# Altium PCB Overview.PcbDoc
Units mm, origin at the board's own origin, x right, y up, seen from the top; angles counter-clockwise.
Board outline 90.3 x 97.6 mm, 2 copper layers (Top Layer, Bottom Layer), stack 1.571 mm thick; 63 components, 22 nets, 227 pads, 5 vias.
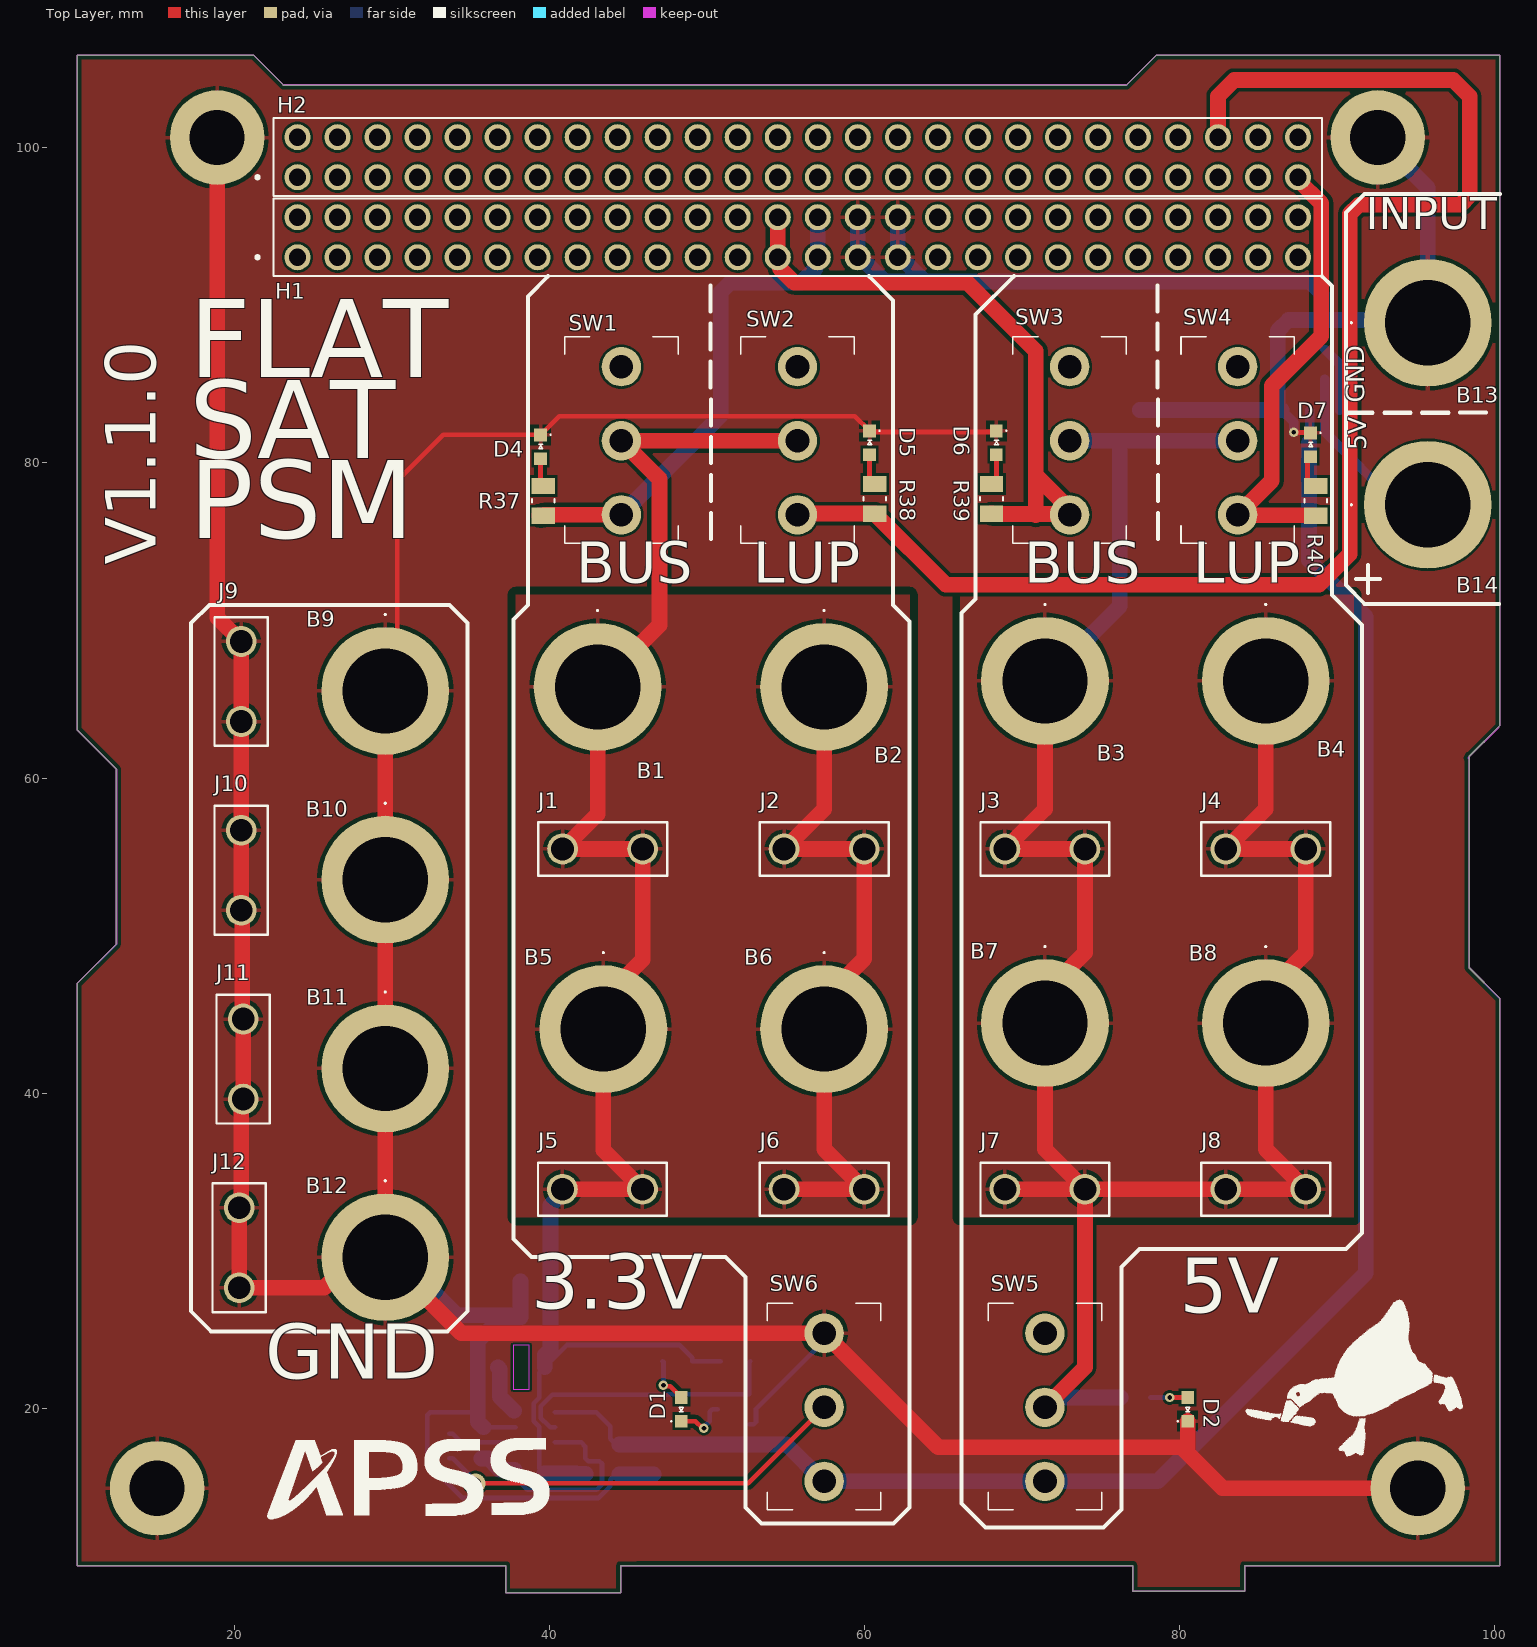
[diagram p0: Top Layer view]
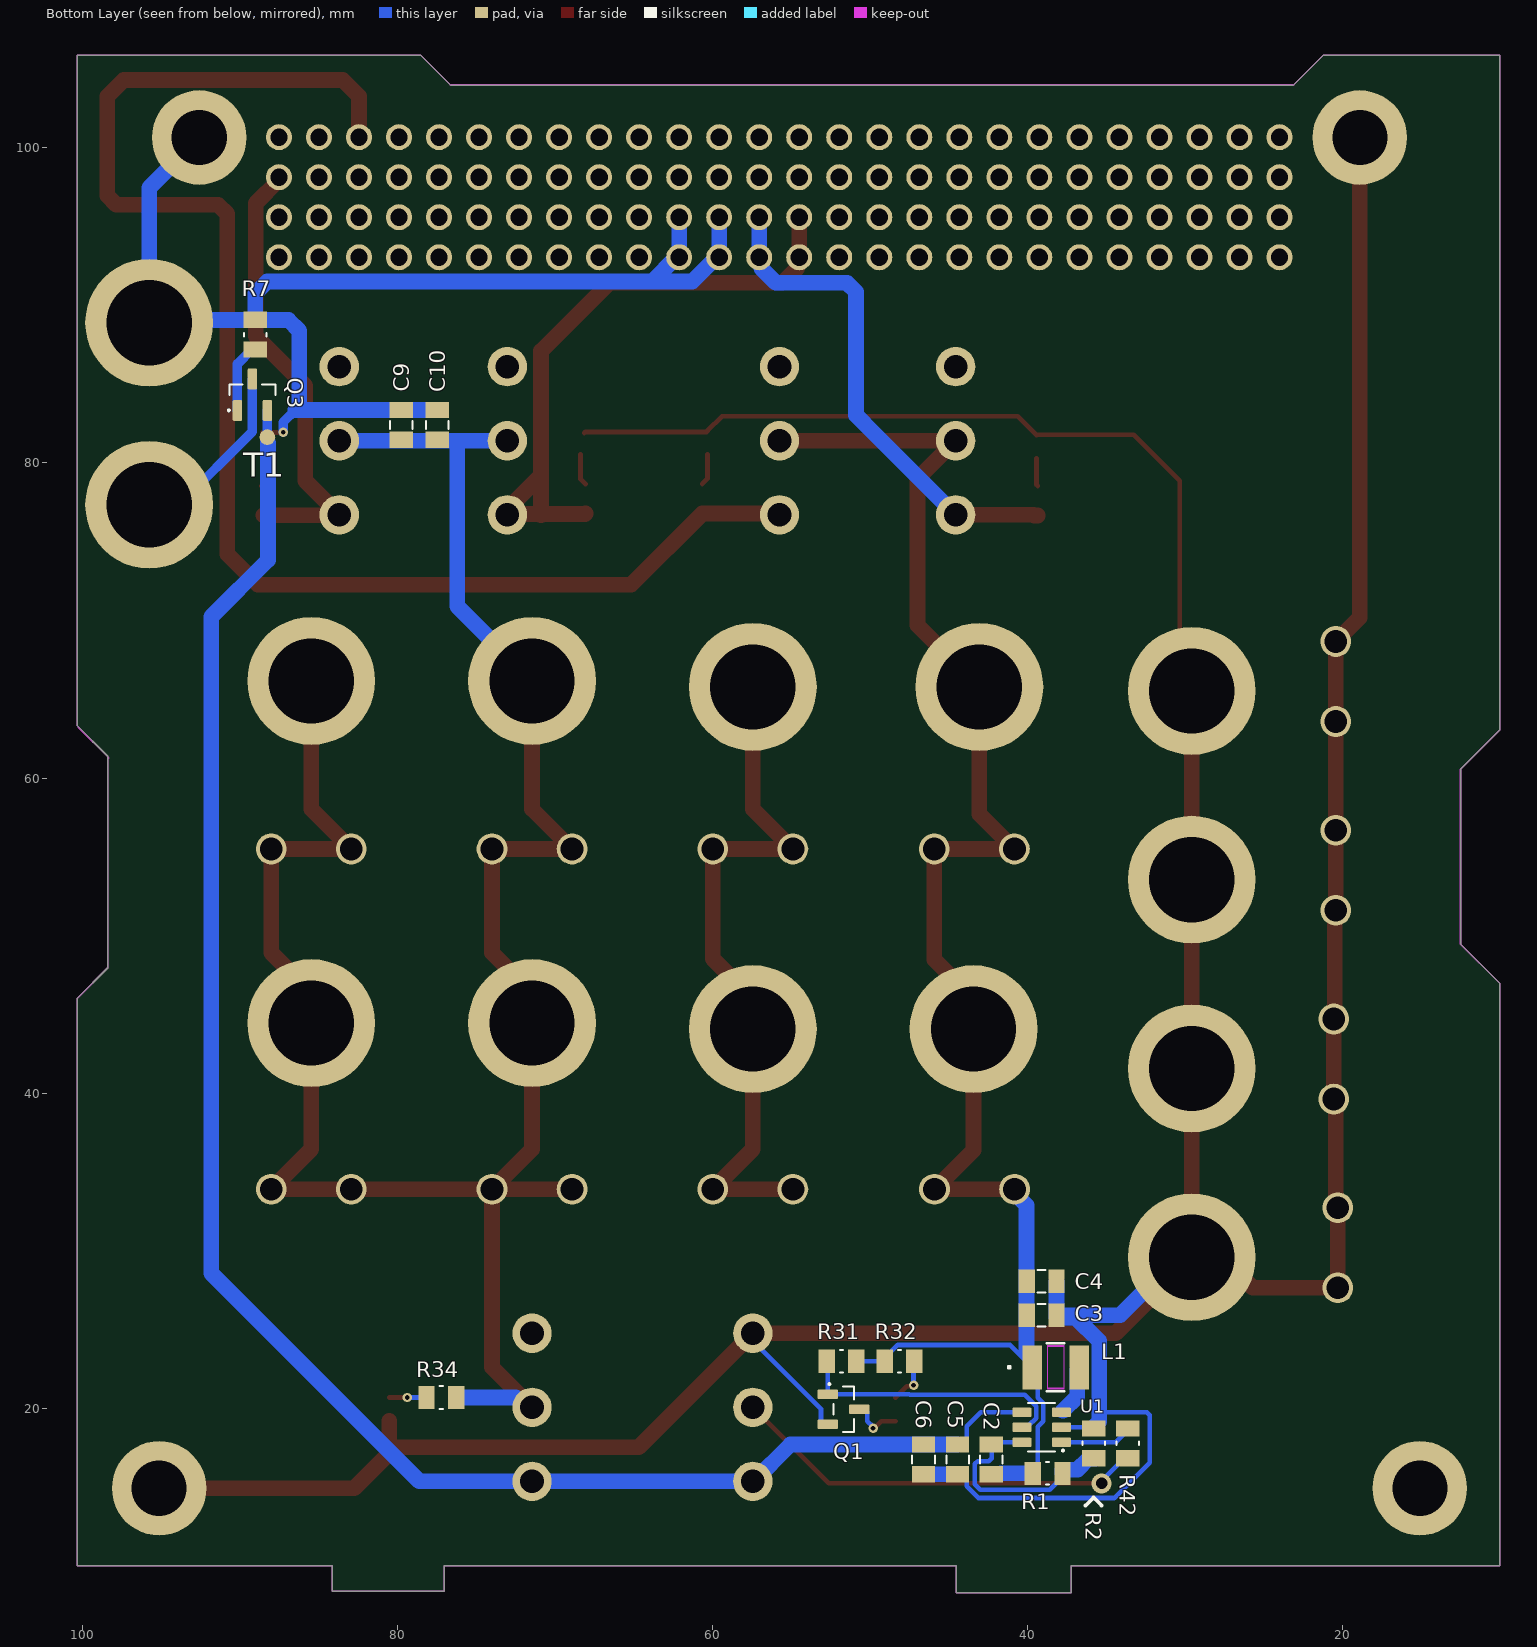
[diagram p1: Bottom Layer view, seen from below]
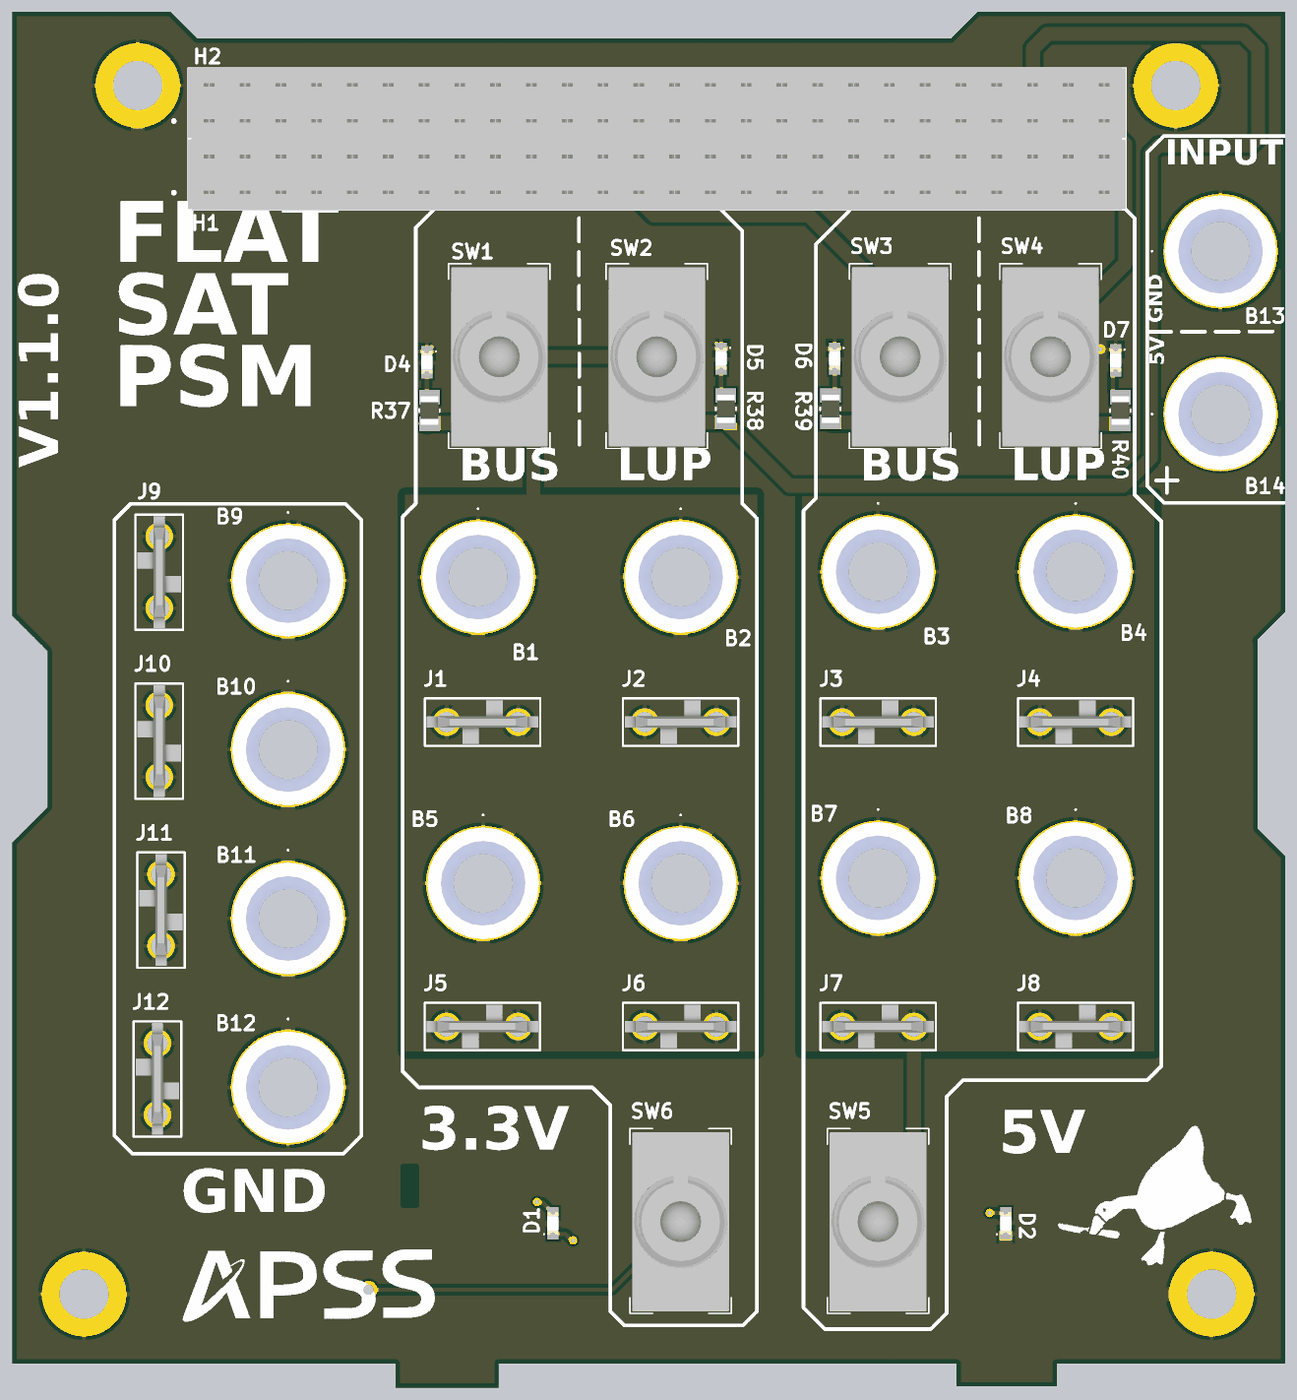
[diagram p2: 3D render of the assembled board from above, using the file's embedded part models]
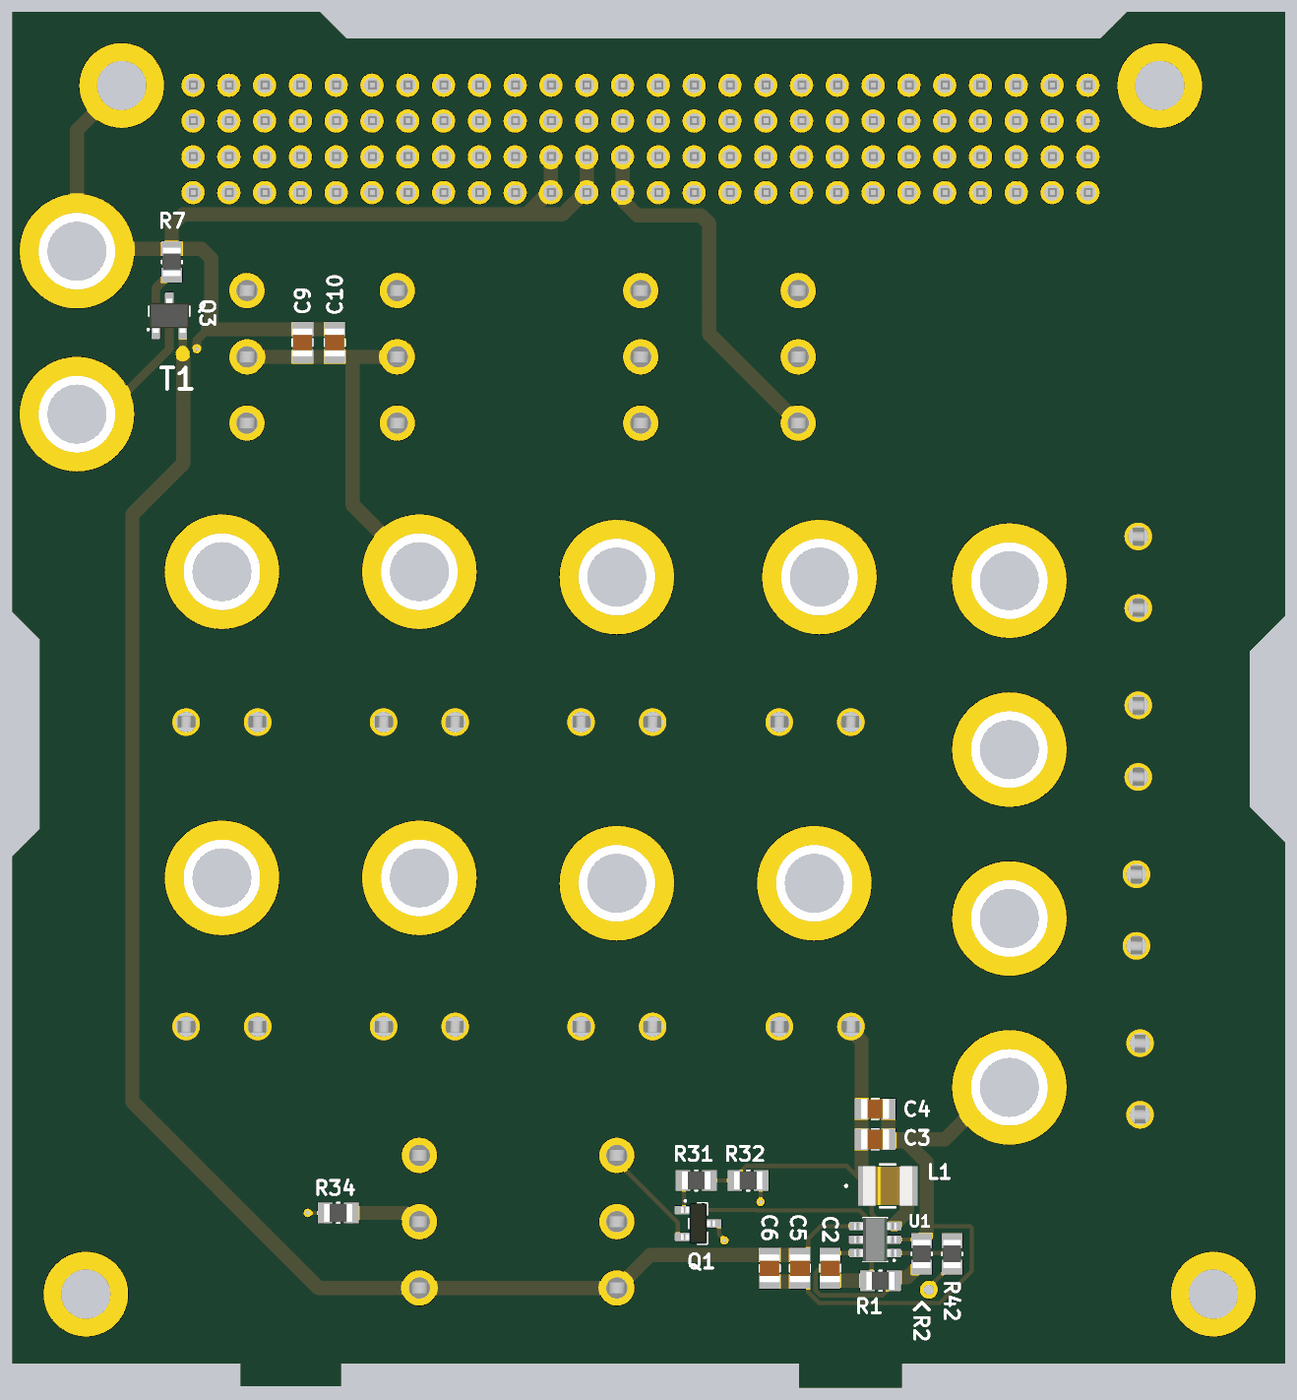
[diagram p3: 3D render of the assembled board from below, using the file's embedded part models]

## Layer stack, top to bottom
Top Solder: solder mask 0.0102, Solder Resist, Dk 3.5
Top Layer: signal copper 0.0356
Dielectric 1: dielectric 1.5, FR-4, Dk 4.8
Bottom Layer: signal copper 0.0356
Bottom Solder: solder mask 0.0102, Solder Resist, Dk 3.5

## Board outline
10.033,10 37.233,10 37.233,8.285 44.533,8.285 44.533,10 45.533,10 52.07,10 77.033,10 77.033,8.385 84.133,8.385 84.133,10 100.33,10 100.33,46.01 98.383,47.957 98.383,61.385 100.333,63.335 100.333,105.885 78.533,105.885 76.633,103.985 23.133,103.985 21.233,105.885 10.033,105.885 10.033,63.06 12.533,60.56 12.533,49.46 10.033,46.96

## Design rules (kind name [scope] priority, off if disabled: settings)
Clearance [All] p1: gap=0.152 ignorepadtopadclearanceinfootprint=FALSE except(0.25: Track-Poly; 0.5: Poly-Poly)
Height [All] p1: minheight=0 maxheight=45.4 prefheight=12.7
HoleSize [All] p1: absolutevalues=TRUE maxlimit=6.2 minlimit=0.3 maxpercent=80.000 minpercent=20.000
MinimumAnnularRing [All] p1: minimumring=0.15
MinimumSolderMaskSliver [All] p1: minsoldermaskwidth=0.1
PolygonConnect ViaConnect [IsVia] p1: connectstyle=Direct reliefconductorwidth=0.254 reliefentries=4 polygonreliefangle="90 Angle" airgapwidth=0.254
PolygonConnect [All] p2: connectstyle=Relief reliefconductorwidth=0.254 reliefentries=4 polygonreliefangle="90 Angle" airgapwidth=0.254
RoutingVias [All] p1: holewidth=0.3 width=0.6 viastyle="Through Hole" minholewidth=0.3 minwidth=0.5 maxholewidth=1 maxwidth=5
SilkToSilkClearance [All] p1: silktosilkclearance=0.1
SilkToSolderMaskClearance [IsPad] p1: minsilkscreentomaskgap=0.1 clearancetoexposedcopper=TRUE
SolderMaskExpansion [All] p1: expansion=0.051 istentingtop=FALSE
SupplyNets "Schematic Supply Nets_9" [InNet('3V3_LUP_BUS')] p1: voltage=0.000
SupplyNets "Schematic Supply Nets_8" [InNet('GND')] p2: voltage=0.000
SupplyNets "Schematic Supply Nets_6" [InNet('5V_LUP_BUS')] p3: voltage=0.000
SupplyNets "Schematic Supply Nets_5" [InNet('3V3_IN')] p4: voltage=0.000
SupplyNets "Schematic Supply Nets_4" [InNet('5V_BUS')] p5: voltage=0.000
SupplyNets "Schematic Supply Nets_3" [InNet('3V3_OUT')] p6: voltage=0.000
SupplyNets "Schematic Supply Nets_1" [InNet('3V3_BUS')] p7: voltage=0.000
SupplyNets "Schematic Supply Nets" [InNet('5V_OUT')] p8: voltage=0.000
Width [All] p1: maxlimit=1 minlimit=0.15 preferedwidth=0.3 minimp=50.000000 maximp=50.000000 favimp=50.000000
25 further rules are at their usual default settings.

## Classes and differential pairs
component class Interfaces: B1 B2 B3 B4 B5 B6 B7 B8 B9 B10 B11 B12 B13 B14 H1 H2 J1 J2 J3 J4 J5 J6 J7 J8 J9 J10 J11 J12 Q3 R7 T1
component class Overview: C2 C3 C4 C5 C6 C9 C10 D1 D2 D4 D5 D6 D7 L1 Q1 Q? R1 R2 R31 R32 R34 R37 R38 R39 R40 R42 SW1 SW2 SW3 SW4 SW5 SW6 U1 U?

## Components (designator, comment, footprint, x,y, rotation, side; value= is the part's Value field where it differs from the comment)
B1 "575-4" 5754 43.071,65.786 r270 top locked
B2 "575-4" 5754 57.446,65.786 r270 top locked
B3 "575-4" 5754 71.459,66.167 r270 top locked
B4 "575-4" 5754 85.471,66.167 r270 top locked
B5 "575-4" 5754 43.434,44.069 r270 top locked
B6 "575-4" 5754 57.446,44.069 r270 top locked
B7 "575-4" 5754 71.459,44.45 r270 top locked
B8 "575-4" 5754 85.471,44.45 r270 top locked
B9 "575-4" 5754 29.591,65.532 r270 top locked
B10 "575-4" 5754 29.591,53.552 r270 top locked
B11 "575-4" 5754 29.591,41.571 r270 top locked
B12 "575-4" 5754 29.591,29.591 r270 top locked
B13 "575-4" 5754 95.758,77.343 r0 top
B14 "575-4" 5754 95.758,88.9 r0 top
C2 "22uF" CAPACITOR_0805_2012M-70N 42.316,16.764 r270 bottom
C3 "22uF" CAPACITOR_0805_2012M-70N 39.116,25.908 r0 bottom
C4 "22uF" CAPACITOR_0805_2012M-70N 39.116,28.067 r0 bottom
C5 "22uF" CAPACITOR_0805_2012M-70N 44.45,16.764 r90 bottom
C6 "100uF" CAPACITOR_0805_2012M-70N 46.609,16.764 r90 bottom
C9 "22uF" CAPACITOR_0805_2012M-70N 79.756,82.423 r270 bottom
C10 "22uF" CAPACITOR_0805_2012M-70N 77.47,82.423 r270 bottom
D1 "LTST-C190 Series" LED_0603_1608M_0.80mm 48.387,19.939 r90 top
D2 "LTST-C190 Series" LED_0603_1608M_0.80mm 80.518,19.939 r90 top
D4 "LTST-C190 Series" LED_0603_1608M_0.80mm 39.445,81.026 r270 top
D5 "LTST-C190 Series" LED_0603_1608M_0.80mm 60.325,81.28 r270 top
D6 "LTST-C190 Series" LED_0603_1608M_0.80mm 68.378,81.28 r270 top
D7 "LTST-C190 Series" LED_0603_1608M_0.80mm 88.311,81.152 r270 top
H1 "ESQ-126-14-G-D" *SAMTEC_ESQ-126-14-G-D 24.022,95.593 r0 top locked
H2 "ESQ-126-14-G-D" *SAMTEC_ESQ-126-14-G-D 24.022,100.672 r0 top locked
J1 "1217861-1" CONN_1217861-1_TEC 40.848,55.499 r0 top locked
J2 "1217861-1" CONN_1217861-1_TEC 54.906,55.499 r0 top locked
J3 "1217861-1" CONN_1217861-1_TEC 68.919,55.499 r0 top locked
J4 "1217861-1" CONN_1217861-1_TEC 82.931,55.499 r0 top locked
J5 "1217861-1" CONN_1217861-1_TEC 40.837,33.909 r0 top locked
J6 "1217861-1" CONN_1217861-1_TEC 54.906,33.909 r0 top
J7 "1217861-1" CONN_1217861-1_TEC 68.919,33.909 r0 top
J8 "1217861-1" CONN_1217861-1_TEC 82.931,33.909 r0 top locked
J9 "1217861-1" CONN_1217861-1_TEC 20.447,63.589 r90 top locked
J10 "1217861-1" CONN_1217861-1_TEC 20.447,51.609 r90 top locked
J11 "1217861-1" CONN_1217861-1_TEC 20.574,39.628 r90 top locked
J12 "1217861-1" CONN_1217861-1_TEC 20.32,27.648 r90 top locked
L1 "DFE322520FD-2R2M=P2" IND_DFE3225_MUR 38.227,22.606 r180 bottom
Q1 "MMBT619" SOT23-3N-1.15mm 51.689,19.939 r180 bottom
Q3 "SSM3J328R,LF" SOT23F-3-0.8mm 89.205,84.328 r90 bottom
R1 "68k" RESISTOR_0805_2012M-50N 38.735,15.875 r0 bottom
R2 "15k" RESISTOR_0805_2012M-50N 35.814,17.78 r270 bottom
R7 "12k" RESISTOR_0805_2012M-50N 89.027,88.138 r270 bottom
R31 "4.3k" RESISTOR_0805_2012M-50N 51.816,22.987 r180 bottom
R32 "240" RESISTOR_0805_2012M-50N 48.133,22.987 r180 bottom
R34 "620" RESISTOR_0805_2012M-50N 77.216,20.689 r0 bottom
R37 "240" RESISTOR_0805_2012M-50N 39.624,77.597 r270 top
R38 "240" RESISTOR_0805_2012M-50N 60.66,77.724 r270 top
R39 "620" RESISTOR_0805_2012M-50N 68.072,77.724 r270 top
R40 "620" RESISTOR_0805_2012M-50N 88.646,77.596 r270 top
R42 "68k" RESISTOR_0805_2012M-50N 33.655,17.78 r90 bottom
SW1 "ANT11SF1CQE" ANT11SF1CQE 44.577,81.407 r0 top
SW2 "ANT11SF1CQE" ANT11SF1CQE 55.753,81.407 r0 top
SW3 "ANT11SF1CQE" ANT11SF1CQE 73.025,81.408 r0 top
SW4 "ANT11SF1CQE" ANT11SF1CQE 83.693,81.407 r0 top
SW5 "ANT11SF1CQE" ANT11SF1CQE 71.459,20.066 r0 top
SW6 "ANT11SF1CQE" ANT11SF1CQE 57.446,20.066 r0 top
T1 "Test Pad" "Test Pad" 88.255,81.638 r180 bottom
U1 "AP3445LW6-7" SOT23-6N-1.4mm 39.116,18.796 r0 bottom

## Footprints (in the part's own frame and the unit in brackets; to place one, negate y for a bottom-side part, rotate by r counter-clockwise, add the part's x,y. Pads: shape width x height; smd on the part's side, far side on the other; paste and mask are expansions set on the pad)
5754 [mm]
  round 8.115 hole 5.41: 1(0,0)
  silkscreen extent -4.9,-0.05 -4.8,0.05, body extent -3.96,-3.96 3.96,3.96, height 2.36
*SAMTEC_ESQ-126-14-G-D [mm]
  round 1.65 hole 1.1: 1(0,-2.54) 2(0,0) 3(2.54,-2.54) 4(2.54,0) 5(5.08,-2.54) 6(5.08,0) 7(7.62,-2.54) 8(7.62,0) 9(10.16,-2.54) 10(10.16,0) 11(12.7,-2.54) 12(12.7,0) 13(15.24,-2.54) 14(15.24,0) 15(17.78,-2.54) 16(17.78,0) 17(20.32,-2.54) 18(20.32,0) 19(22.86,-2.54) 20(22.86,0) 21(25.4,-2.54) 22(25.4,0) 23(27.94,-2.54) 24(27.94,0) 25(30.48,-2.54) 26(30.48,0) 27(33.02,-2.54) 28(33.02,0) 29(35.56,-2.54) 30(35.56,0) 31(38.1,-2.54) 32(38.1,0) 33(40.64,-2.54) 34(40.64,0) 35(43.18,-2.54) 36(43.18,0) 37(45.72,-2.54) 38(45.72,0) 39(48.26,-2.54) 40(48.26,0) 41(50.8,-2.54) 42(50.8,0) 43(53.34,-2.54) 44(53.34,0) 45(55.88,-2.54) 46(55.88,0) 47(58.42,-2.54) 48(58.42,0) 49(60.96,-2.54) 50(60.96,0) 51(63.5,-2.54) 52(63.5,0)
  silkscreen extent -2.64,-3.74 65.03,1.2, body extent -1.55,-3.79 65,1.29, height 11.11
ANT11SF1CQE [mm] "Toggle switch, SPDT"
  round 2.5 hole 1.5: 1(0,-4.7) 2(0,0) 3(0,4.7)
  silkscreen extent -3.6,-6.5 3.6,6.6, body extent -3.43,-6.35 3.43,6.35, height 28.21
CAPACITOR_0805_2012M-70N [mm] "Capacitor, 0805 (2012 metric), 0.7mm high, nominal pads,"
  rect 1.04x1.47 smd mask+0.051: 1(-0.94,0) 2(0.94,0)
  silkscreen extent -0.25,-0.72 0.25,0.72, body extent -1,-0.72 1,0.73, height 1.23
CONN_1217861-1_TEC [mil]
  round 77 / inner oval 77x60 / far side round 77 hole 57 paste-99999 mask+0: 1(0,0) 2(200,0)
  silkscreen extent -61,-66 261,66, body extent -56,-61 256,61, height 415
IND_DFE3225_MUR [mil]
  rect 49x110 smd paste+0 mask+0: 1(-58.5,0) 2(58.5,0)
  Top Layer keep-out region: -20,-53 -20,53 20,53 20,-53
  Keep-Out Layer region: -20,-55 -20,55 20,55 20,-55
  silkscreen extent -119,-60 22,60, body extent -69,-55 69,55, height 79
LED_0603_1608M_0.80mm [mm] "LED, 0603 (1608 metric), 0.8mm high"
  rect 0.8x0.8 smd mask+0.051: A(0.75,0) C(-0.75,0)
  silkscreen extent -0.79,-0.12 0.13,0.66, body extent -0.8,-0.4 0.8,0.4, height 0.8
RESISTOR_0805_2012M-50N [mm] "Resistor, 0805 (2012 metric), nominal pads"
  rect 1.04x1.47 smd mask+0.051: 1(-0.94,0) 2(0.94,0)
  silkscreen extent -0.1,-0.72 0.1,0.72, body extent -1,-0.62 1,0.63, height 0.5
SOT23-3N-1.15mm [mm] "SOT23, 3-pin, 1.15mm high, nominal pads"
  rrect25% 1.32x0.6 smd mask+0.051: 1(-1,0.95) 2(-1,-0.95) 3(1,0)
  silkscreen extent -0.93,-1.45 0.65,1.63, body extent -1.19,-1.45 1.21,1.45, height 0.91
SOT23-6N-1.4mm [mm] "SOT23, 6 pins, nominal pads, 1.4mm high"
  rrect25% 1.21x0.59 smd mask+0.051: 1(-1.255,0.95) 2(-1.255,0) 3(-1.255,-0.95) 4(1.255,-0.95) 5(1.255,0) 6(1.255,0.95)
  silkscreen extent -1.37,-1.55 0.85,1.55, body extent -1.5,-1.55 1.5,1.55, height 1.4
SOT23F-3-0.8mm [mm] "SOT23, 3-pin, flat leads, 0.8mm high"
  rrect25% 1.32x0.6 smd mask+0.051: 1(-1,0.95) 2(-1,-0.95) 3(1,0)
  silkscreen extent -1.02,-1.45 0.65,1.52, body extent -1.2,-1.4 1.2,1.4, height 0.88
"Test Pad" [mm] "Exposed copper pad"
  round 1 smd paste-10: 1(0,0)

## Part data
B1 B2 B3 B4 B5 B6 B7 B8 B9 B10 B11 B12 B13 B14: "Test Plugs & Test Jacks NON-INSUL JACK .218\" BRASS NICKEL PLTD", Manufacturer_Name="Keystone Electronics", Mouser Part Number=534-575-4, Datasheet Link=https://www.keyelco.com/product.cfm/product_id/2379, Geometry.Height=2.49mm, Manufacturer_Part_Number=575-4, Mouser Price/Stock=https://www.mouser.co.uk/ProductDetail/Keystone-Electronics/575-4?qs=w4ABFRoM%2FL8pPaUzIDyX8Q%3D%3D
C2 C3 C4 C5 C6 C9 C10: library part "Generic Capacitor", "Passive - Capacitor, Generic", Tolerance=?%
D1 D2 D4 D5 D6 D7: "Diode - LED, 0603", Colour=GREEN, MF Part No.=LTST-C190KGKT, Package=0603, Rated Voltage="5V Reverse", Temp Range="-30°C ~ 85°C", APSS Standard Part="APSS Standard", Supplier 1=Digikey
H1 H2: TEMP="-55°C ~ 125°C", MCR=5.7A, MF="Samtec Inc.", MFPN=ESQ-126-14-G-D, MVP=Y, MVR=550VAC, S1L=https://www.digikey.co.nz/product-detail/en/samtec-inc/ESQ-126-14-G-D/SAM11114-ND/6695078, S1PN=SAM11114-ND
J1 J2 J3 J4 J5 J6 J7 J8 J9 J10 J11 J12: "250 FASTON,PCB TAB,TCBR", Manufacturer_Name="TE Connectivity", Copyright="Copyright (C) 2025 Ultra Librarian. All rights reserved.", Manufacturer_Part_Number=1217861-1, RefDes=RefDes, Type=Type
L1: "Description", Manufacturer_Name=Murata, Manufacturer_Part_Number=DFE322520FD-2R2M=P2, Copyright="Copyright (C) 2025 Ultra Librarian. All rights reserved.", Type="Fixed Inductors"
Q1: "Transistor - BJT NPN MMBT619", Package=SOT-23-3, Power=350mW, Rated Voltage="50 Vce", Supplier 1 Part No.=4786-MMBT619CT-ND, Temp Range="-55°C ~ 150°C (TJ)", APSS Standard Part="APSS Standard", MF Part No.=MMBT619, Supplier 1=Digikey
Q3: "Transistor - MOSFET, P-Channel SSM3J328R,LF", Package=SOT23-3, Power=1W, Rated Voltage="20 Vds", Supplier 1 Part No.=SSM3J328RLFCT-ND, Temp Range="0°C ~ 150°C (TJ)", APSS Standard Part="APSS Standard", MF Part No.=SSM3J328R,LF, Supplier 1=Digikey
R1 R2 R7 R31 R32 R34 R37 R38 R39 R40 R42: library part "Generic Resistor", "Passive - Resistor, Generic", Tolerance=?%
SW1 SW2 SW3 SW4 SW5 SW6: "Switch - Toggle, SPDT, 5A @ 28VDC", Package=-, Rated Current=5A, Rated Voltage="28 VDC", Supplier 1 Part No.=2449-ANT11SF1CQE-ND, Temp Range="-40°C ~ 85°C (TA)", Circuit=SPDT, MF Part No.=ANT11SF1CQE, Supplier 1=Digikey
U1: "IC - Regulator, Buck, 2A, 2.7V to 5.5V In, 0.6V to Vin Out, SOT23-6", Package=SOT-23-5, Rated Voltage=5.5V, Supplier 1 Part No.=AP3445LW6-7DICT-ND, Temp Range="-40°C ~ 85°C (TA)", APSS Standard Part="APSS Standard", MF Part No.=AP3445LW6-7, Supplier 1=Digikey

## Free pads (board coordinates)
  round 6 hole 3.5: 4(15.113,14.928) 4(18.923,100.653) 4(92.583,100.653) 4(95.123,14.928)

## Via types
v1: diameter 0.6, hole 0.3, Top Layer to Bottom Layer, 4 vias
v2: diameter 1.27, hole 0.711, Top Layer to Bottom Layer, 1 vias

## Nets (pads, with @x,y where several pads share a name; then routed paths per layer and width w, separated by ;. In a path a pad name is that pad's centre, name@x,y a point inside that pad or via, vN(x,y) a via of type N, cw(c..) or ccw(c..) an arc to the next point about the centre after c; other vN are vias at no path point)
3V3_BUS: H1.27 H1.28 R37.2 SW1.1 | length 31.9
  Top Layer w1: R37.2@39.37,76.657 39.585,76.657 39.635,76.707 SW1.1
  Bottom Layer w1: SW1.1 49.784,81.914 50.891,83.021 50.891,90.854 51.477,91.44 55.996,91.44 56.918,92.362 56.918,92.929 H1.27 H1.28
3V3_EN: R42.2 U1.1 | length 4.4
  Bottom Layer w0.3: R42.2@33.655,18.39 33.87,18.39 34.414,17.846 U1.1
3V3_IN: C5.2 C6.2 Q3.2 SW5.1 SW6.1 T1.1 U1.4 | length 115.5
  Bottom Layer w0.3: U1.4 42.976,19.746 43.865,18.857 43.865,18.074 44.235,17.704 C5.2
  Bottom Layer w0.6: T1.1@88.215,81.277 88.215,81.598 T1.1 Q3.2
  Bottom Layer w1: C5.2 C6.2 55.053,17.704 57.391,15.366 78.612,15.366 91.821,28.575 91.821,70.231 88.215,73.837 T1.1@88.215,81.277
3V3_LUP_BUS: H2.48 R38.2 SW2.1 | length 93.2
  Top Layer w1: SW2.1 55.83,76.784 R38.2 65.179,72.265 88.845,72.265 90.805,74.224 90.805,95.807 91.391,96.393 97.839,96.393 98.425,96.979 98.425,103.251 97.371,104.305 83.477,104.305 82.442,103.27 H2.48
3V3_OUT: B1.1 B2.1 B5.1 B6.1 C2.2 C3.2 C4.2 J1.1 J1.2 J2.1 J2.2 J5.1 J5.2 J6.1 J6.2 L1.1 R1.2 R31.2 R32.1 SW1.2 SW2.2 | length 155.8
  Top Layer w1: J5.1 J5.2 43.434,36.392 B5.1 43.434,45.994 45.928,48.488 J1.2 J1.1 43.071,57.722 B1.1 46.99,69.705 46.99,78.994 SW1.2 54.838,81.407 55.347,81.916 SW2.2@55.753,81.916 ; J6.1 J6.2 57.446,36.449 B6.1 57.446,45.994 59.986,48.534 J2.2 J2.1 57.446,58.039 B2.1 B2.1@57.446,67.711
  Bottom Layer w0.3: R1.2 39.37,16.18 39.37,18.823 39.011,19.182 39.011,20.31 39.37,20.669 39.37,22.263 L1.1 41.131,24.024 48.251,24.024 49.073,23.202 R32.1 R31.2
  Bottom Layer w1: R1.2 41.695,15.875 41.726,15.844 42.296,15.844 C2.2 ; L1.1 39.713,23.381 40.081,23.749 40.081,32.895 40.837,33.65 J5.1
3V3_PG: Q1.1 R31.1 U1.5 | length 17.6
  Bottom Layer w0.3: U1.5 40.061,18.796 39.708,19.149 39.684,19.149 39.464,19.369 39.464,20.123 40.201,20.861 47.494,20.861 47.522,20.889 Q1.1 52.689,22.92 R31.1
5V_BUS: H1.25 H1.26 R39.2 SW3.1 | length 39.8
  Top Layer w1: H1.26 H1.25 54.626,92.929 54.626,92.362 55.548,91.44 66.548,91.44 70.882,87.106 70.882,76.673 ; R39.2 68.092,76.764 72.969,76.764 SW3.1 ; 70.882,79.213 SW3.1@72.752,77.343
5V_LUP_BUS: H2.51 R40.2 SW4.1 | length 29.1
  Top Layer w1: H2.51 87.522,97.956 88.999,96.479 88.999,88.042 85.852,84.895 85.852,78.866 SW4.1 83.724,76.676 85.852,76.676 R40.2@88.499,76.676
5V_OUT: B3.1 B4.1 B7.1 B8.1 C9.2 C10.2 J3.1 J3.2 J4.1 J4.2 J7.1 J7.2 J8.1 J8.2 R34.1 SW3.2 SW4.2 SW5.2 | length 147.9
  Top Layer w1: J7.1 J7.2 ; SW5.2 73.999,22.606 J7.2 ; B3.1 71.459,58.039 J3.1 J3.2 73.999,48.915 71.459,46.375 B7.1 71.459,36.449 J7.2 ; B4.1 85.471,58.039 J4.1 J4.2 88.011,48.915 85.471,46.375 B8.1 85.471,36.449 J8.2 J8.1 J7.2
  Bottom Layer w1: SW5.2 71.864,20.066 72.487,20.689 R34.1 ; B3.1 76.2,70.908 76.2,81.408 SW3.2 ; 76.2,81.408 77.47,81.408 79.756,81.408 SW4.2
5V_RAW: B13.1 Q3.3 | length 11.8
  Bottom Layer w0.3: B13.1@93.853,77.343 B13.1
  Bottom Layer w0.6: Q3.3 89.205,81.991 B13.1@93.853,77.343
GND: B9.1 B10.1 B11.1 B12.1 B14.1 C3.1 C4.1 C5.1 C6.1 C9.1 C10.1 D2.C D4.C D5.C D6.C D7.C H1.29 H1.30 H1.31 H1.32 J9.1 J9.2 J10.1 J10.2 J11.1 J11.2 J12.1 J12.2 pad.4 Q1.2 R2.1 R7.1 SW6.3 U1.2 | length 382.3
  Top Layer w0.3: B9.1 30.353,66.294 30.353,78.867 33.274,81.788 D4.C@39.445,81.788 ; D4.C 40.629,82.959 59.396,82.959 D5.C 60.389,81.967 68.084,81.967 D6.C@68.147,81.903 ; v1@87.272,81.925 D7.C@88.571,81.925 ; B14.1@95.758,86.937 B14.1
  Top Layer w1: pad.4@18.923,100.653 18.923,70.193 J9.2 J9.1 J10.2 J10.1 20.511,51.545 20.511,44.772 J11.2 J11.1 20.447,39.501 20.447,32.855 J12.2 J12.1 25.723,27.648 27.666,29.591 B12.1 ; B9.1 B10.1 B11.1 B12.1 ; D2.C 80.518,17.145 ; pad.4@92.583,100.639 pad.4@92.583,100.653 ; pad.4@95.123,14.928 82.735,14.928 80.518,17.145 ; B12.1 34.416,24.766 SW6.3 64.686,17.526 80.137,17.526 80.518,17.145
  Bottom Layer w0.3: 35.466,19.746 32.434,19.746 32.258,19.57 32.258,16.554 34.51,14.303 43.117,14.303 43.865,15.051 43.865,15.454 44.235,15.824 C5.1 ; R2.1@35.824,18.796 U1.2 ; Q1.2 52.974,18.989 53.124,19.139 53.124,19.98 57.446,24.303 SW6.3
  Bottom Layer w0.6: 86.476,83.363 87.249,82.59 v1(87.249,81.948)
  Bottom Layer w1: B12.1 30.456,29.591 34.139,25.908 36.95,25.908 C3.1 ; R2.1@35.824,18.796 35.466,19.154 35.466,19.746 35.466,24.273 36.95,25.757 38.156,25.757 38.176,25.777 C4.1 ; C5.1 C6.1 ; H1.30 H1.29 59.758,93.053 61.296,91.514 63.836,91.514 ; H1.32 H1.31 62.298,93.053 63.836,91.514 ; C10.1 C9.1 86.233,83.363 ; 86.476,83.363 86.233,83.363 ; pad.4@92.583,100.639 95.758,97.464 B14.1 95.58,89.078 R7.1 ; 63.836,91.514 88.267,91.514 89.027,90.755 R7.1 ; 86.233,83.363 86.233,88.392 86.919,89.078 R7.1
NetC2_1: C2.1 R1.1 R2.2 U1.6 | length 13.9
  Bottom Layer w0.3: R1.1@37.795,15.66 38.617,14.838 43.012,14.838 43.353,15.179 43.353,16.469 43.176,16.646 42.467,16.646 42.291,16.822 42.291,17.577 42.022,17.846 U1.6
  Bottom Layer w1: R2.2@35.703,16.82 36.139,16.82 36.849,16.11 37.775,16.11 37.795,16.09 R1.1
NetD1_A: D1.A R32.2 | length 3
  Top Layer w0.3: v1(47.244,21.463) 47.301,21.406 47.67,21.406 D1.A
  Bottom Layer w0.3: R32.2 47.244,22.936 v1(47.244,21.463)
NetD1_C: D1.C Q1.3 | length 3.4
  Top Layer w0.3: D1.C 49.281,19.189 49.733,18.736 v1(49.815,18.736)
  Bottom Layer w0.3: v1(49.815,18.736) 49.815,18.818 50.186,19.189 50.186,19.789 50.336,19.939 Q1.3
NetD2_A: D2.A R34.2 | length 2.4
  Top Layer w0.3: v1(79.375,20.689) D2.A
  Bottom Layer w0.3: R34.2 v1(79.375,20.689)
NetD4_A: D4.A R37.1 | length 1.8
  Top Layer w0.3: R37.1@39.37,78.537 39.445,78.612 D4.A
NetD5_A: D5.A R38.1 | length 2
  Top Layer w0.3: D5.A 60.325,78.999 R38.1
NetD6_A: D6.A R39.1 | length 2
  Top Layer w0.3: R39.1 68.378,78.97 D6.A
NetD7_A: D7.A R40.1 | length 2.3
  Top Layer w0.3: D7.A 88.119,80.21 88.119,78.906 88.489,78.536 R40.1
NetL1_2: L1.2 U1.3 | length 3.2
  Bottom Layer w1: L1.2 36.863,22.484 36.863,20.744 U1.3@37.756,19.851
NetQ3_1: Q3.1 R7.2 | length 4.5
  Bottom Layer w0.3: R7.2 R7.2@89.242,87.198
  Bottom Layer w0.6: R7.2@89.242,87.198 90.155,86.285 Q3.1
NetR42_1: R42.1 SW6.2 | length 26.5
  Top Layer w0.3: v2(35.306,15.24) 52.62,15.24 SW6.2
  Bottom Layer w0.3: R42.1 33.87,16.84 35.306,15.404 v2(35.306,15.24)
pads on no net: H1.1 H1.2 H1.3 H1.4 H1.5 H1.6 H1.7 H1.8 H1.9 H1.10 H1.11 H1.12 H1.13 H1.14 H1.15 H1.16 H1.17 H1.18 H1.19 H1.20 H1.21 H1.22 H1.23 H1.24 H1.33 H1.34 H1.35 H1.36 H1.37 H1.38 H1.39 H1.40 H1.41 H1.42 H1.43 H1.44 H1.45 H1.46 H1.47 H1.48 H1.49 H1.50 H1.51 H1.52 H2.1 H2.2 H2.3 H2.4 H2.5 H2.6 H2.7 H2.8 H2.9 H2.10 H2.11 H2.12 H2.13 H2.14 H2.15 H2.16 H2.17 H2.18 H2.19 H2.20 H2.21 H2.22 H2.23 H2.24 H2.25 H2.26 H2.27 H2.28 H2.29 H2.30 H2.31 H2.32 H2.33 H2.34 H2.35 H2.36 H2.37 H2.38 H2.39 H2.40 H2.41 H2.42 H2.43 H2.44 H2.45 H2.46 H2.47 H2.49 H2.50 H2.52 SW1.3 SW2.3 SW3.3 SW4.3 SW5.3

## Polygon pours and split planes (outlines as drawn)
GND on Top Layer "GND_L01_P004" (solid, remove dead copper, pour order 4): 103.124,110.617 8.636,110.617 5.842,107.823 7.366,106.299 7.366,5.969 105.283,5.969 106.172,6.858
3V3_OUT on Top Layer "3V3_OUT_L01_P003" (solid, pour order 3): 62.865,71.628 37.882,71.628 37.882,32.131 62.865,32.131
5V_OUT on Top Layer "5V_OUT_L01_P000" (solid, pour order 0): 91.059,71.628 66.076,71.628 66.076,32.131 91.059,32.131

## Keep-outs
Keep-Out Layer:
  lines w0.1: 98.312,61.27 100.262,63.22 ; 98.383,61.385 98.383,47.957 100.33,46.01 100.33,10 84.133,10 84.133,8.385 77.033,8.385 77.033,10 52.07,10 45.533,10 44.533,10 44.533,8.285 37.233,8.285 37.233,10 10.033,10 10.033,46.96 12.533,49.46 12.533,60.56 10.033,63.06 10.033,105.885 21.233,105.885 23.133,103.985 76.633,103.985 78.533,105.885 100.333,105.885 100.333,63.335

## Silkscreen, mask and mechanical layers (free items; w line width, h text height)
Top Overlay:
  drawing of 73 lines, arcs and shapes, not listed
  text "INPUT" at 91.814,94.169 h3.5
  text "FLAT" at 17.145,83.821 h8.5
  text "GND" at 92.12,83.809 h2 r90
  text "5V" at 92.239,80.817 h2 r90
  text "SAT" at 17.145,78.678 h8.5
  text "PSM" at 17.153,73.598 h8.5
  text "V1.1.0" at 16.061,73.539 h5.5 r90
  text "LUP" at 52.933,71.544 h4.5
  text "LUP" at 80.873,71.544 h4.5
  text "BUS" at 41.705,71.528 h4.5
  text "BUS" at 70.153,71.528 h4.5
  text "3.3V" at 38.868,25.19 h6
  text "5V" at 80.01,24.936 h6
  text "GND" at 21.971,20.745 h6
Bottom Overlay:
  lines w0.254: 35.302,13.819 35.81,14.327 36.318,13.819